# Altium PCB GSMMHM.PcbDoc
Units mm, origin at the board's own origin, x right, y up, seen from the top; angles counter-clockwise.
Board outline 38.5 x 33.5 mm, 2 copper layers (Top Layer, Bottom Layer); 22 components, 30 nets, 160 pads, 5 vias.
Unrouted connection lines stored in the file: 91.
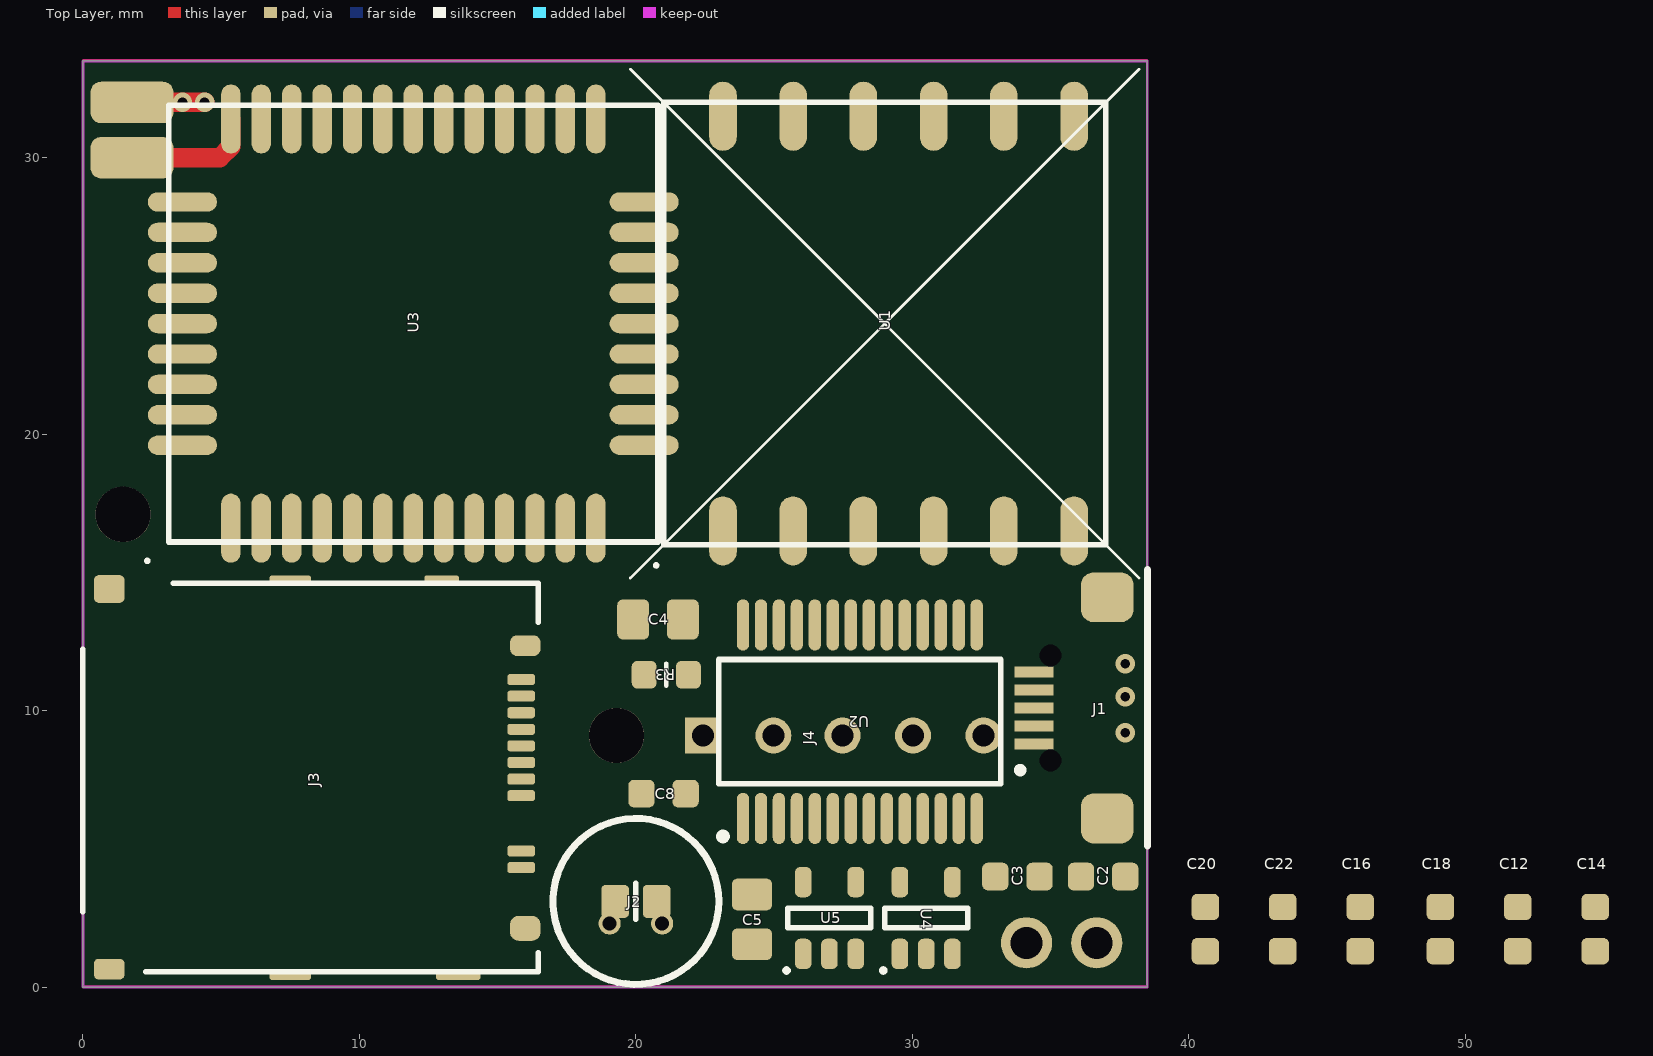
[diagram p0: Top Layer view]
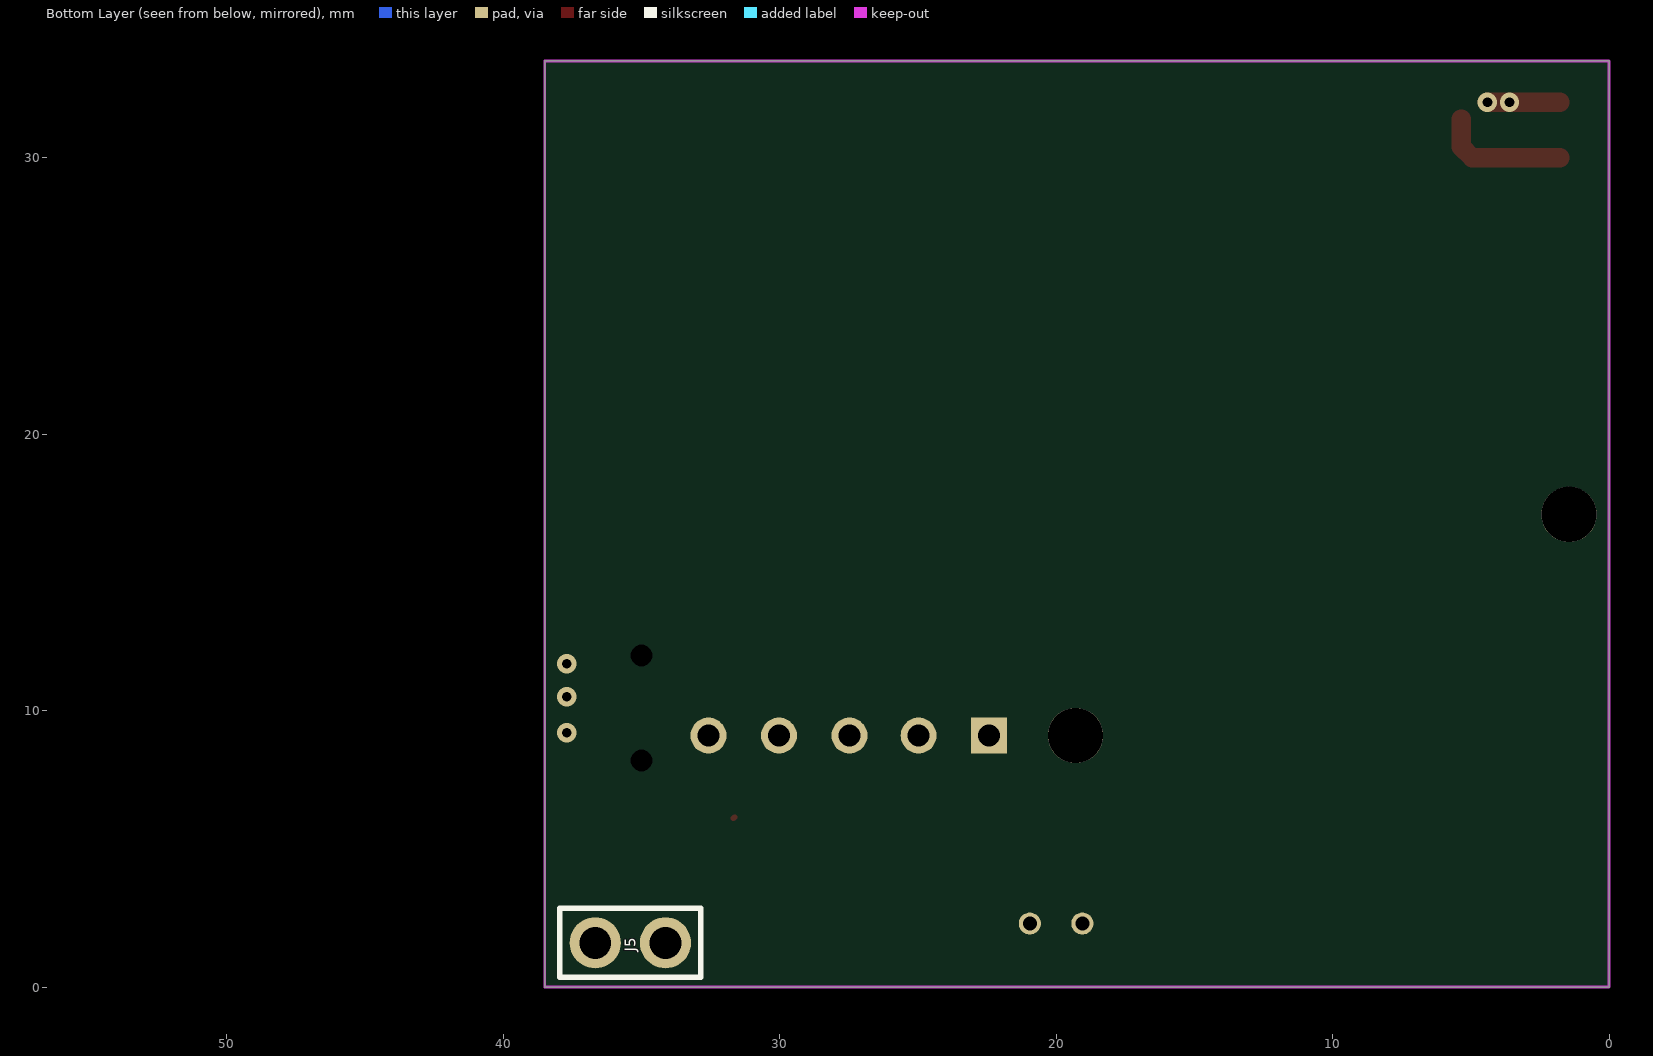
[diagram p1: Bottom Layer view, seen from below]

## Layer stack, top to bottom
Top Solder: solder mask 0.0102, Solder Resist, Dk 3.5
Top Layer: signal copper 0.0356
Dielectric 1: dielectric 0.32, FR-4, Dk 4.8
Bottom Layer: signal copper 0.0356
Bottom Solder: solder mask 0.0102, Solder Resist, Dk 3.5

## Board outline
0,0 0,33.5 38.5,33.5 38.5,0

## Design rules (kind name [scope] priority, off if disabled: settings)
Clearance Clearance_110V_Keepout [InNetClass('110V') vs OnLayer('Keep-Out Layer')] p1: gap=0.3
Clearance Clearance_Q1Q2Q3 [(InComponent('Q1') OR InComponent('Q2') OR InComponent('Q3')) vs (InComponent('Q1') OR InComponent('Q2') OR InComponent('Q3'))] p2: gap=1
Clearance Clearance_110V_NoNet [InNetClass('110V') vs InNet('No Net')] p3: gap=0.5
Clearance Clearance_220V_110V [InNetClass('220V') vs InNetClass('110V')] p4: gap=1
Clearance Clearance_240VAC_220V [InNet('240VAC') vs InNetClass('220V')] p5: gap=1
Clearance Clearance_Poly [All vs InPolygon] p6: gap=0.4
Clearance Clearance_TrackAll [All vs IsTrack] p7: gap=0.2
Clearance Clearance_TrackU4 [InComponent('U4') vs IsTrack] p8: gap=0.25
Clearance Clearance_220V [InNetClass('220V')] p9: gap=2
Clearance Clearance_110V [InNetClass('110V')] p10: gap=1
Clearance [All] p11: gap=0.2
ComponentClearance [All] p1 off: gap=0.254 collisioncheckmode=3 verticalgap=0.254 showdistances=FALSE
Height [All] p1 off: minheight=0 maxheight=25.4 prefheight=12.7
PolygonConnect PolygonConnect_GND [All vs IsVia] p1: connectstyle=Direct reliefconductorwidth=0.254 reliefentries=4 polygonreliefangle="90 Angle" airgapwidth=0.254
PolygonConnect [All] p2: connectstyle=Relief reliefconductorwidth=0.254 reliefentries=4 polygonreliefangle="90 Angle" airgapwidth=0.254
RoomDefinition GSMMHM [InComponentClass('GSMMHM')] p1 off: confinementstyle=ConfineIn formatcopy=TRUE lockcomponents=FALSE outline 152.543,1.651 410.48,1.651 410.48,36.449 152.543,36.449
RoutingVias [All] p1: holewidth=0.711 width=1.27 viastyle="Through Hole" minholewidth=0.711 minwidth=1.27 maxholewidth=0.711 maxwidth=1.27
SolderMaskExpansion [All] p1: expansion=0.102
UnpouredPolygon [All] p1: allowunpoured=FALSE
Width [All] p1: maxlimit=5 minlimit=0.2 preferedwidth=0.5
27 further rules are at their usual default settings.

## Components (designator, comment, footprint, x,y, rotation, side; value= is the part's Value field where it differs from the comment)
C2 "1uF" SMD_0603_CAPC1608X95N 36.9,4 r180 top
C3 "1uF" SMD_0603_CAPC1608X95N 33.8,4 r0 top
C4 "10uF" SMD_0805_CAPC2012X95N 20.8,13.3 r180 top
C5 "10uF" SMD_0805_CAPC2012X95N 24.2,2.45 r270 top
C8 "100nF" SMD_0603_CAPC1608X95N 21,7 r180 top
C12 "33pF" SMD_0603_CAPC1608X95N 51.9,2.1 r90 top
C14 "33pF" SMD_0603_CAPC1608X95N 54.7,2.1 r90 top
C16 "33pF" SMD_0603_CAPC1608X95N 46.2,2.1 r90 top
C18 "33pF" SMD_0603_CAPC1608X95N 49.1,2.1 r90 top
C20 "33pF" SMD_0603_CAPC1608X95N 40.6,2.1 r90 top
C22 "33pF" SMD_0603_CAPC1608X95N 43.4,2.1 r90 top
J1 "ATTEND 207A-BBA0-R" SMD_CON_MICRO_USB 34.4,10.1 r0 top
J2 "CON_2PINS" PTH_MIC_6MM_2.7MM_PITCH1.9 20,3.1 r180 top
J3 "MICRO SIM" SMD_CON-WURTH_MICRO_SIM_693021010811 16.35,7.575 r270 top
J4 "CON_5PINS" "SIP5 - PGM" 27.5,9.1 r0 top
J5 "CON_2PINS" PTH_HDRV02W64P254_1X02 35.4,1.6 r0 bottom
R3 "2k" SMD_0603_RESC1608X55N 21.1,11.3 r180 top
U1 "QUECTEL_L80 / L86" SMD_MOD_L80_SOIC254P1600X1600-12N 29,24 r90 top
U2 "PIC18F27J53" SMD_SOP65P780X200-28N 28.1,9.6 r90 top
U3 "QUECTEL_M66" SMD_MOD_M66-44N 11.95,24 r90 top locked
U4 "MCP73811 450mA" "SMD_SOT26_SOT95P285X140-5N - DLV" 30.5,2.5 r90 top
U5 "BU33TD3WG" "SMD_SOT26_SOT95P285X140-5N - DLV" 27,2.5 r90 top

## Footprints (in the part's own frame and the unit in brackets; to place one, negate y for a bottom-side part, rotate by r counter-clockwise, add the part's x,y. Pads: shape width x height; smd on the part's side, far side on the other; paste and mask are expansions set on the pad)
PTH_HDRV02W64P254_1X02 [mm]
  round 1.85 hole 1.15 mask+0.075: 1(-1.27,0) 2(1.27,0)
  silkscreen extent -2.55,-1.25 2.55,1.25, body extent -2.54,-1.25 2.54,1.25, height 8
PTH_MIC_6MM_2.7MM_PITCH1.9 [mm] "PMO-6027P-40KDQ(20120820)"
  round 0.8 hole 0.5: 1(-0.95,0.8) 2(0.95,0.8)
  rrect33% 1x1.2 smd mask+0.075: 1(-0.75,0) 2(0.75,0)
  silkscreen extent -3,-3 3,3, body extent -2.98,-2.99 3,2.99, height 6.45
"SIP5 - PGM" [mm]
  rect 1.3x1.3 hole 0.8: 1(-5.075,0)
  round 1.3 hole 0.8: 2(-2.525,0) 3(-0.025,0) 4(2.525,0) 5(5.075,0)
SMD_0603_CAPC1608X95N [mm]
  rrect42% 0.95x1 smd mask+0.075: 1(-0.8,0) 2(0.8,0)
  body extent -0.8,-0.4 0.8,0.4, height 0.95
SMD_0603_RESC1608X55N [mm]
  rrect44% 0.9x1 smd mask+0.075: 1(-0.8,0) 2(0.8,0)
  silkscreen extent 0,-0.4 0,0.4, body extent -0.8,-0.4 0.8,0.4, height 0.55
SMD_0805_CAPC2012X95N [mm]
  rrect35% 1.15x1.45 smd mask+0.075: 1(-0.9,0) 2(0.9,0)
  body extent -1,-0.62 1,0.63, height 1.25
SMD_CON-WURTH_MICRO_SIM_693021010811 [mm] "WURTH Micro SIM 693021010811"
  rrect50% 0.4x1 smd mask+0.05: 1(3.25,-0.5) 2(0.05,-0.5) 3(-1.15,-0.5) 4(-2.35,-0.5) 5(2.65,-0.5) 6(-0.55,-0.5) 7(-1.75,-0.5) 8(-2.95,-0.5) 9(-3.55,-0.5) 10(0.65,-0.5)
  rrect67% 0.75x1.1 smd mask+0.05: 11(-4.775,-0.35)
  rrect67% 0.9x1.1 smd mask+0.05: 12(5.45,-0.35)
  rrect44% 0.375x1.6 smd mask+0.05: 13(7.125,-2.775)
  rrect44% 0.375x1.5 smd mask+0.05: 14(7.125,-8.85) 17(-7.125,-8.85)
  rrect44% 0.75x1.1 smd mask+0.05: 15(6.925,-15.4)
  rrect33% 1x1.1 smd mask+0.05: 16(-6.825,-15.4)
  rrect44% 0.375x1.25 smd mask+0.05: 18(-7.125,-3.375)
  silkscreen extent -7.02,-16.35 7.02,0.13, body extent -7.25,-16.21 7.25,0.38, height 1.2
SMD_CON_MICRO_USB [mm]
  rect 1.4x0.4 smd: 1(0,-1.3) 2(0,-0.65) 3(0,0) 4(0,0.65) 5(0,1.3)
  round 0.7 hole 0.8: 6(0.6,1.9) 9(0.6,-1.9)
  rrect50% 1.9x1.8 smd: 7(2.65,4) 8(2.65,-4)
  silkscreen extent -0.6,-5 4.1,5, body extent -0.1,-4 5.5,4, height 2.7
SMD_MOD_L80_SOIC254P1600X1600-12N [mm] "Quectel L80 L86"
  oval 2.5x1 smd mask+0.075: 1(-7.5,5.85) 2(-7.5,3.31) 3(-7.5,0.77) 4(-7.5,-1.77) 5(-7.5,-4.31) 6(-7.5,-6.85) 7(7.5,-6.85) 8(7.5,-4.31) 9(7.5,-1.77) 10(7.5,0.77) 11(7.5,3.31) 12(7.5,5.85)
  silkscreen extent -9.2,-9.2 9.2,9.2, body extent -8,-8 8,8, height 6.95
SMD_MOD_M66-44N [mm] "Quectel M66"
  oval 2.5x0.7 smd mask+0.075: 1(-7.4,6.6) 2(-7.4,5.5) 3(-7.4,4.4) 4(-7.4,3.3) 5(-7.4,2.2) 6(-7.4,1.1) 7(-7.4,0) 8(-7.4,-1.1) 9(-7.4,-2.2) 10(-7.4,-3.3) 11(-7.4,-4.4) 12(-7.4,-5.5) 13(-7.4,-6.6) 23(7.4,-6.6) 24(7.4,-5.5) 25(7.4,-4.4) 26(7.4,-3.3) 27(7.4,-2.2) 28(7.4,-1.1) 29(7.4,0) 30(7.4,1.1) 31(7.4,2.2) 32(7.4,3.3) 33(7.4,4.4) 34(7.4,5.5) 35(7.4,6.6)
  oval 0.7x2.5 smd mask+0.075: 14(-4.4,-8.35) 15(-3.3,-8.35) 16(-2.2,-8.35) 17(-1.1,-8.35) 18(0,-8.35) 19(1.1,-8.35) 20(2.2,-8.35) 21(3.3,-8.35) 22(4.4,-8.35) 36(4.4,8.35) 37(3.3,8.35) 38(2.2,8.35) 39(1.1,8.35) 40(0,8.35) 41(-1.1,8.35) 42(-2.2,8.35) 43(-3.3,8.35) 44(-4.4,8.35)
  silkscreen extent -8.69,-8.85 7.9,9.73, body extent -7.9,-8.85 7.9,8.85, height 2.3
SMD_SOP65P780X200-28N [mm]
  oval 1.85x0.45 smd mask+0.05: 1(-3.5,4.225) 2(-3.5,3.575) 3(-3.5,2.925) 4(-3.5,2.275) 5(-3.5,1.625) 6(-3.5,0.975) 7(-3.5,0.325) 8(-3.5,-0.325) 9(-3.5,-0.975) 10(-3.5,-1.625) 11(-3.5,-2.275) 12(-3.5,-2.925) 13(-3.5,-3.575) 14(-3.5,-4.225) 15(3.5,-4.225) 16(3.5,-3.575) 17(3.5,-2.925) 18(3.5,-2.275) 19(3.5,-1.625) 20(3.5,-0.975) 21(3.5,-0.325) 22(3.5,0.325) 23(3.5,0.975) 24(3.5,1.625) 25(3.5,2.275) 26(3.5,2.925) 27(3.5,3.575) 28(3.5,4.225)
  silkscreen extent -4.27,-5.1 2.25,5.1, body extent -4.1,-5.25 4.1,5.25, height 2
"SMD_SOT26_SOT95P285X140-5N - DLV" [mm]
  rrect67% 1.1x0.6 smd mask+0.075: 1(-1.3,0.95) 2(-1.3,0) 3(-1.3,-0.95) 4(1.3,-0.95) 5(1.3,0.95)
  silkscreen extent -2.05,-1.5 0.35,1.7, body extent -1.5,-1.5 1.5,1.5, height 1.2

## Part data
C2 C3 C4 C5 C8 C12 C14 C16 C18 C20 C22: library part C
J1: library part CON_USB_MINI
J3: library part CON_2ROWS_18PINS
R3: library part R
U1: library part MOD_QUECTEL_L80_L86
U2: library part IC_PIC18F27J53
U3: library part MOD_QUECTEL_M66
U4: "MCP73812"
U5: library part IC_BU33TD3WG

## Free pads (board coordinates)
  rrect50% 3x1.5 smd: 0(1.775,30) 0(1.775,32)
  round 2 hole 2: 1(1.45,17.1) 1(19.3,9.1)

## Via types
v1: diameter 0.7, hole 0.35, Top Layer to Bottom Layer, tented both sides, 5 vias

## Nets (pads, with @x,y where several pads share a name; then routed paths per layer and width w, separated by ;. In a path a pad name is that pad's centre, name@x,y a point inside that pad or via, vN(x,y) a via of type N, cw(c..) or ccw(c..) an arc to the next point about the centre after c; other vN are vias at no path point)
1PPS: U1.6 U2.24
3.3V: C5.1 J4.2 R3.1 U2.14 U2.20 U5.4 U5.5
4.0V: C2.1 J5.2 U1.4 U1.5 U3.42 U3.43 U3.44 U4.3 U5.1 U5.3
5.0V: C3.1 J1.1 J1.9 U4.1 U4.4 U4.5
DM/D-: J1.2 U2.15
DP/D+: J1.3 U2.16
FORCE_ON: U1.7 U2.12
GND: C2.2 C3.2 C4.2 C5.2 C8.2 C12.1 C14.1 C20.2 C22.2 J1.5 J1.6 J1.7 J1.8 J3.11 J3.12 J3.13 J3.14 J3.15 J3.16 J3.17 J3.18 J4.3 J5.1 pad.0@1.775,32 U1.3 U1.12 U2.8 U2.19 U3.27 U3.34 U3.36 U3.37 U3.40 U3.41 U4.2 U5.2 | length 2.6
  Top Layer w0.7: pad.0@1.775,32 v1(4.4,32)
  other v1: 37.7,9.2 37.7,10.5 37.7,11.7 3.6,32
GPS_RST: U1.10 U2.13 | length 0.1
  Top Layer w0.2: U2.13@31.625,6.15 U2.13
GPS_RX: U1.1 U2.17
GPS_TX: U1.2 U2.18
GSM_DCD: U2.23 U3.21
GSM_DTR: U2.3 U3.19
GSM_PWRKEY: U2.2 U3.7
GSM_RI: U2.22 U3.20
GSM_RX: U2.25 U3.18
GSM_TX: U2.26 U3.17
MCLR: C8.1 J1.4 J4.1 R3.2 U2.1
MICN: C16.2 C18.2 C20.1 C22.1 J2.2 U3.4
MICP: C12.2 C14.2 C16.1 C18.1 J2.1 U3.3
PGC: J4.5 U2.27
PGD: J4.4 U2.28
RF_ANT: pad.0@1.775,30 U3.35 | length 4.7
  Top Layer w0.7: pad.0@1.775,30 4.95,30 5.35,30.4 U3.35
SIM_CLK: J3.3 U3.13
SIM_GND: J3.5 U3.10
SIM_IO: J3.7 U3.11
SIM_RST: J3.2 U3.12
SIM_VDD: J3.1 U3.14
SIM_VPP: J3.6
VCAP: C4.1 U2.6
pads on no net: J3.4 J3.8 J3.9 J3.10 U1.8 U1.9 U1.11 U2.4 U2.5 U2.7 U2.9 U2.10 U2.11 U2.21 U3.1 U3.2 U3.5 U3.6 U3.8 U3.9 U3.15 U3.16 U3.22 U3.23 U3.24 U3.25 U3.26 U3.28 U3.29 U3.30 U3.31 U3.32 U3.33 U3.38 U3.39

## Polygon pours and split planes (outlines as drawn)
GND on Top Layer "Top Layer-No Net" (solid, shelved, pour order 7): 0,0.05 38.5,0.05 38.5,33.55 0,33.55
GND on Bottom Layer "Top Layer-No Net1" (solid, shelved, pour order 8): 0,0 38.5,0 38.5,33.5 0,33.5

## Keep-outs
Keep-Out Layer:
  the board outline again, w0.1

## Text inside footprints (layer, text, board x,y; h text height)
J5: Mechanical 3 "1" at 33.09,2.55 h0.5 r180